# Altium PCB АСТА.758723.037_V1.PcbDoc
Units mm, origin at the board's own origin, x right, y up, seen from the top; angles counter-clockwise.
Board outline 70 x 50 mm, 2 copper layers (Top Layer, Bottom Layer), stack 1.47 mm thick; 54 components, 30 nets, 169 pads, 102 vias.
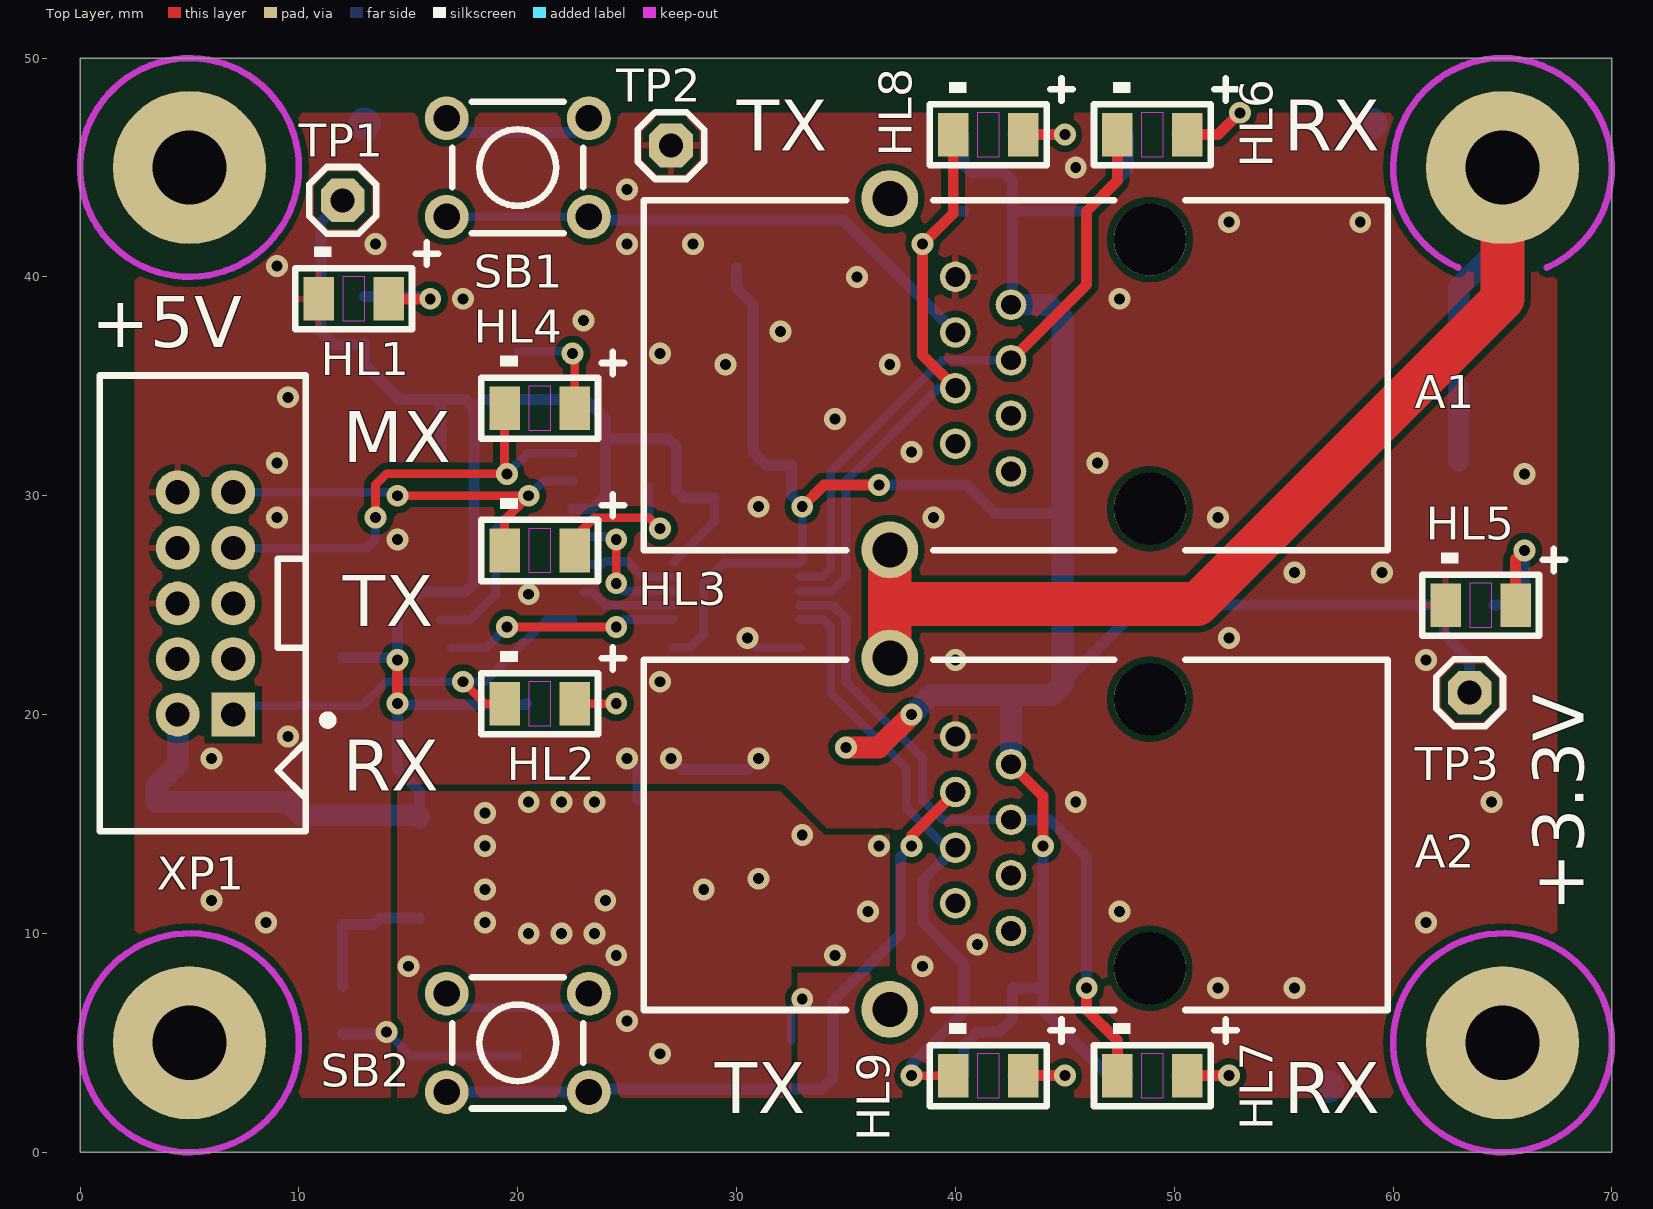
[diagram p0: Top Layer view]
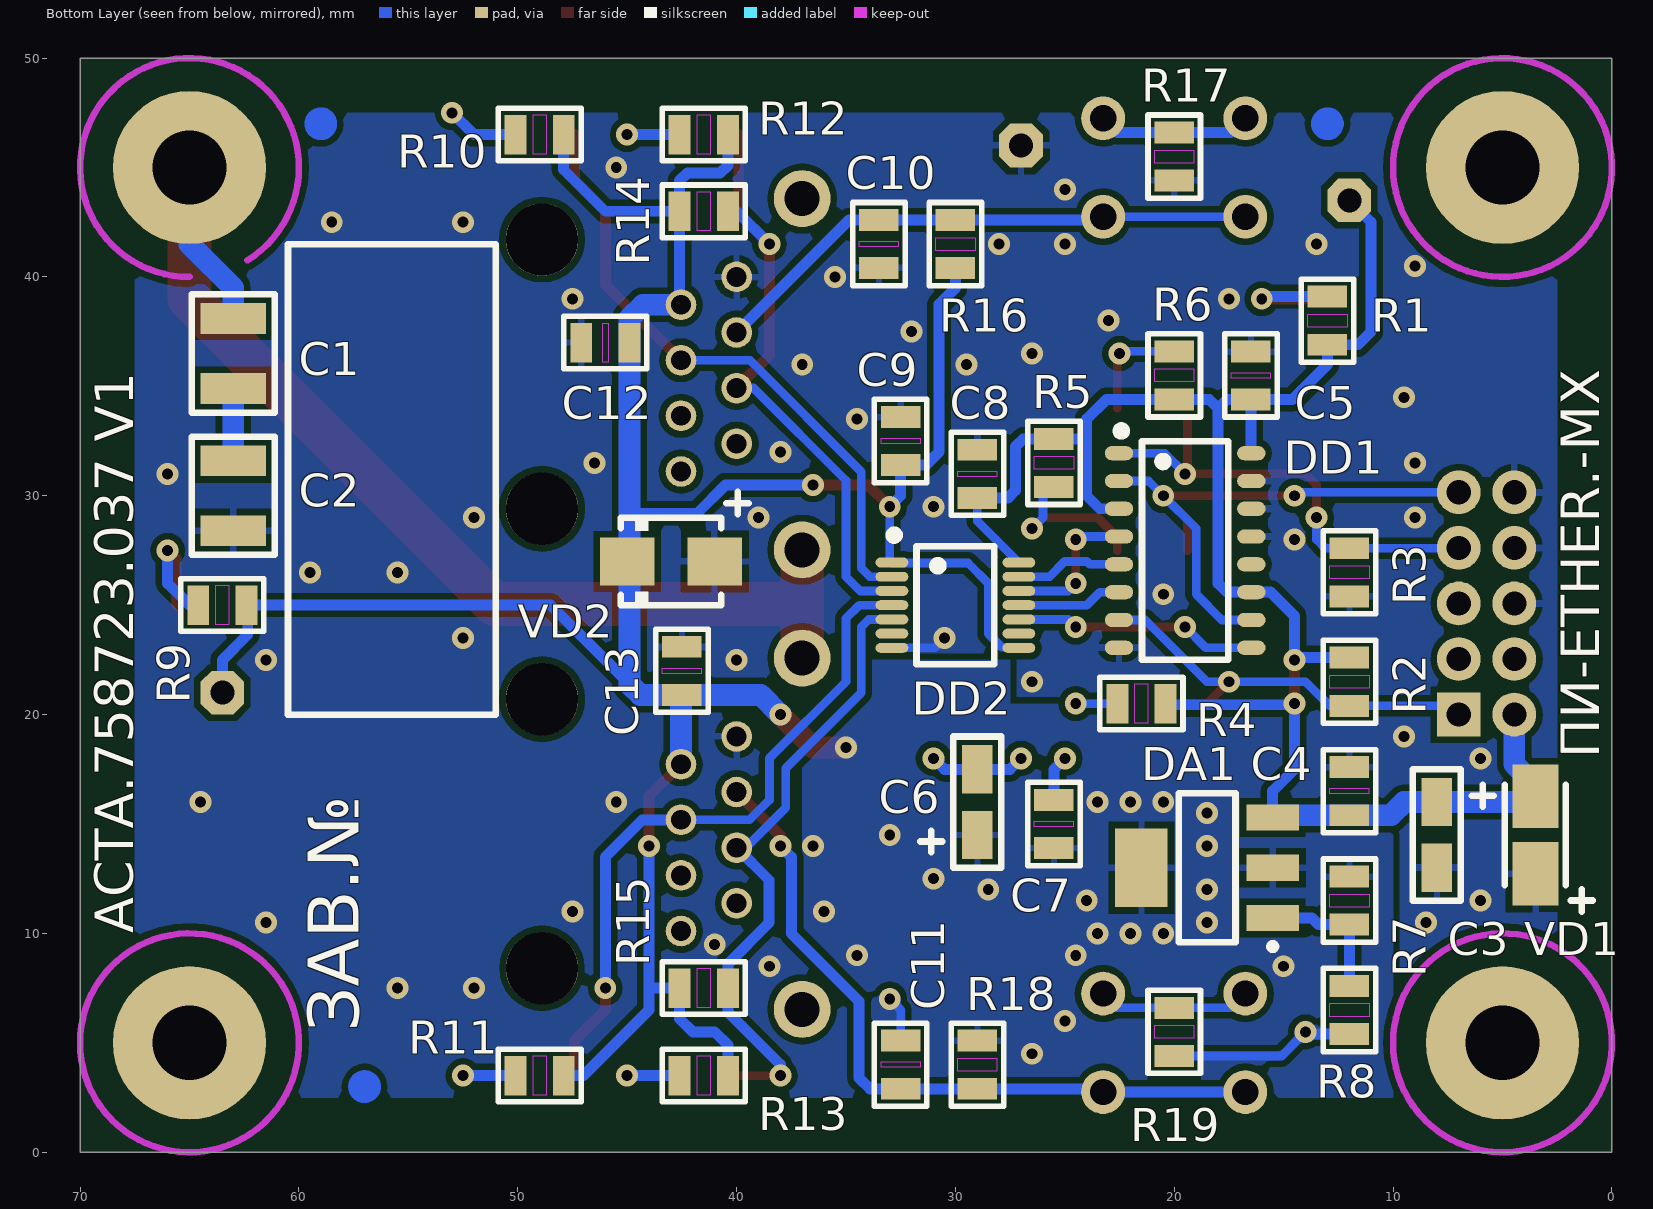
[diagram p1: Bottom Layer view, seen from below]
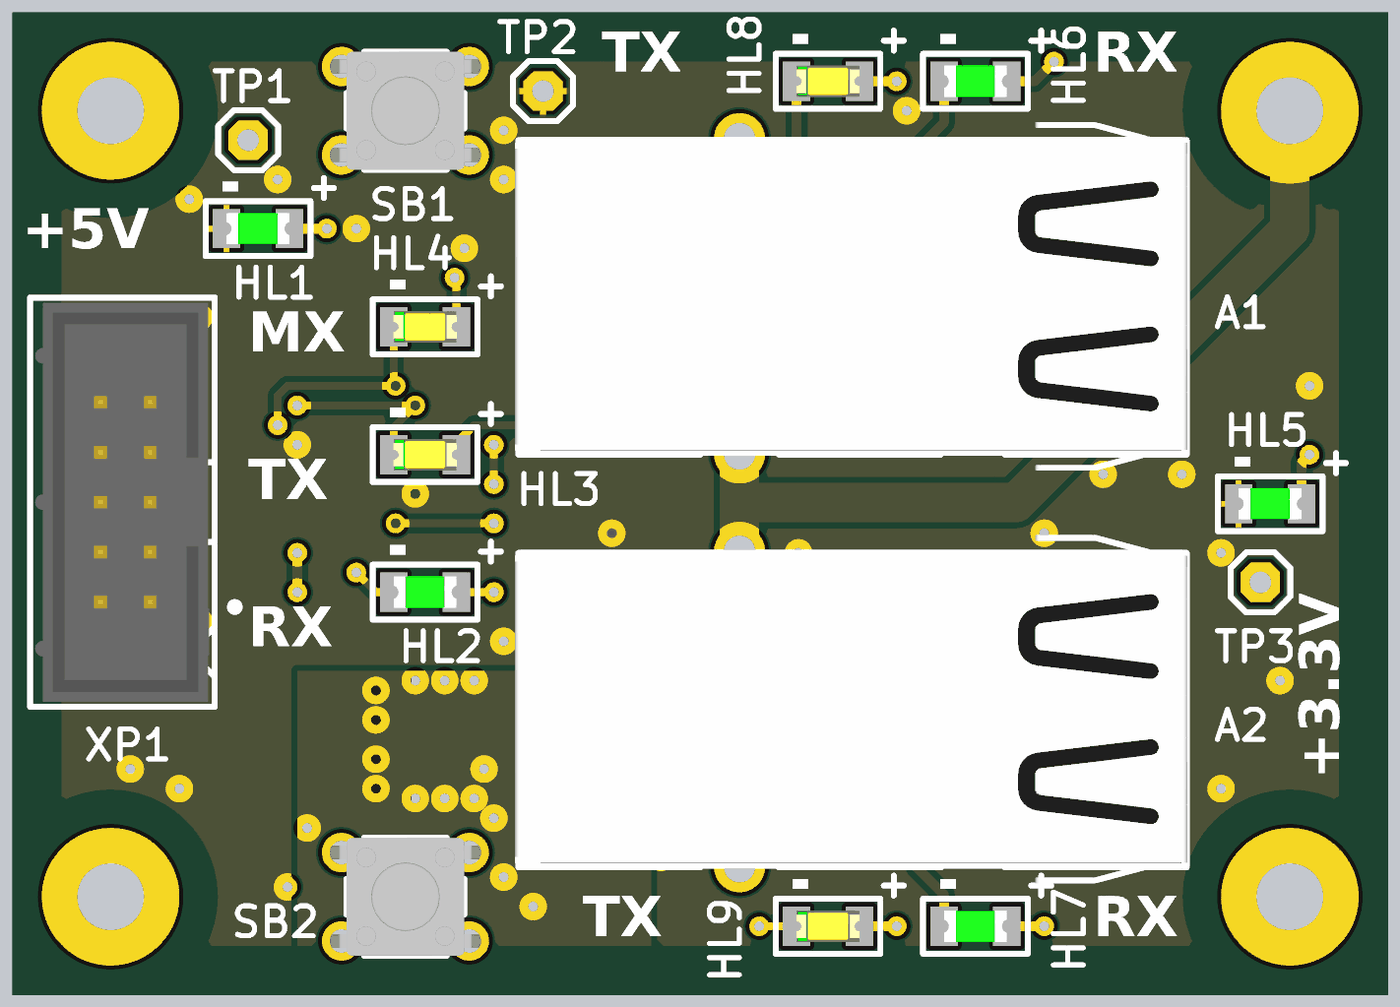
[diagram p2: 3D render of the assembled board from above, using the file's embedded part models]
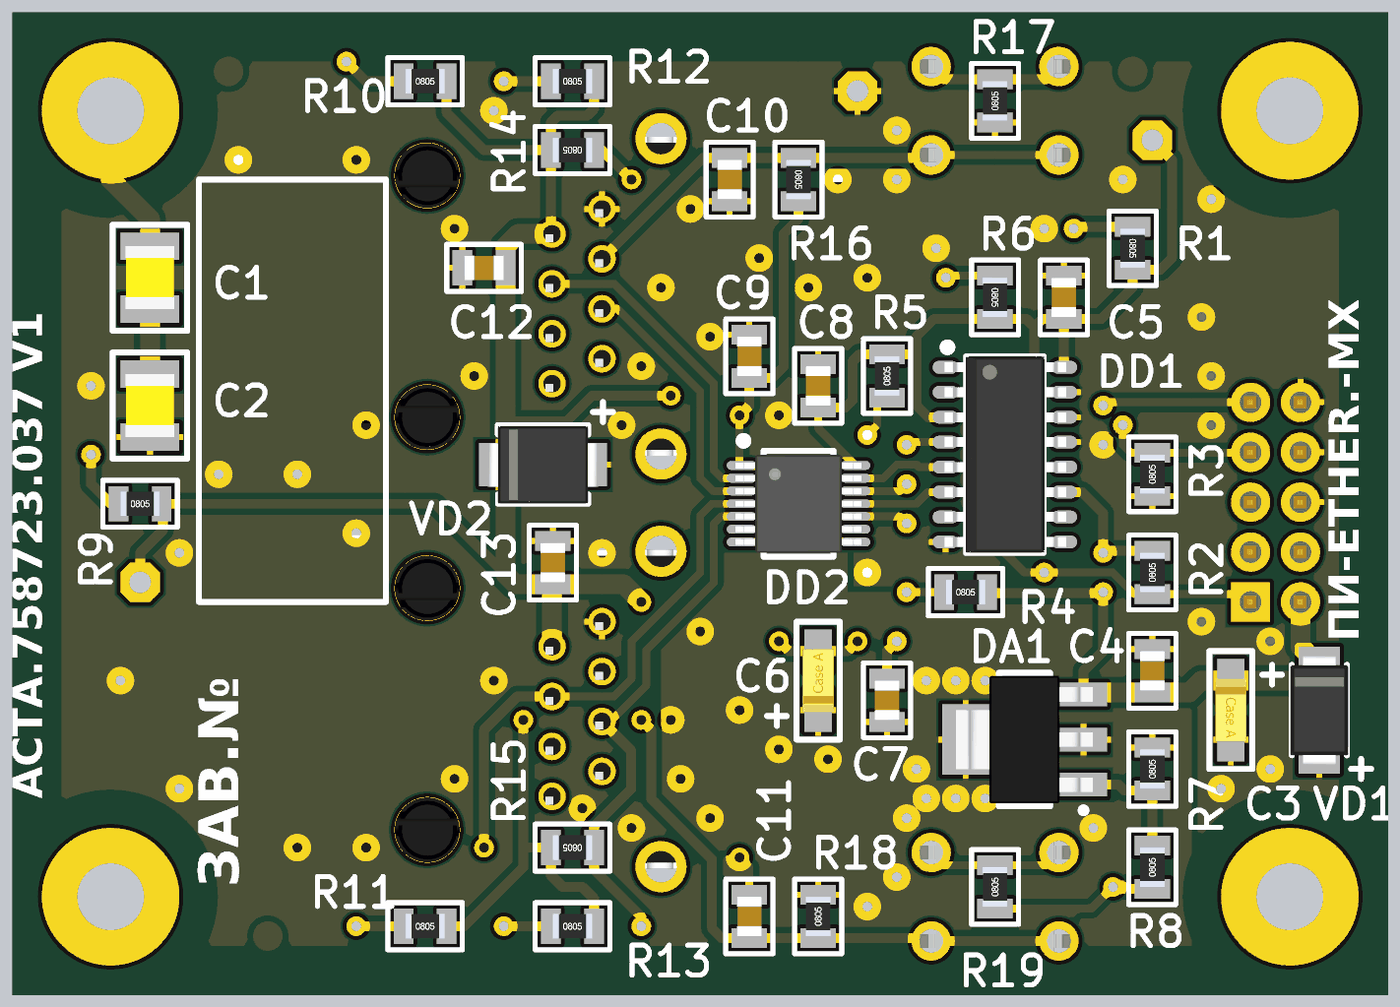
[diagram p3: 3D render of the assembled board from below, using the file's embedded part models]

## Layer stack, top to bottom
Top Solder: solder mask 0.015, Solder Resist, Dk 3.5
Top Layer: signal copper 0.035
Dielectric 1: dielectric 1.4, FR-4, Dk 4.8
Bottom Layer: signal copper 0.035
Bottom Solder: solder mask 0.015, Solder Resist, Dk 3.5

## Board outline
0,0 0,50 70,50 70,0

## Design rules (kind name [scope] priority, off if disabled: settings)
Clearance Clearance_GND-MCU [All vs InNamedPolygon('GND-MCU')] p1: gap=0.3 ignorepadtopadclearanceinfootprint=FALSE except(0: Arc-Hole Track-Hole SMDPad-Hole THPad-Hole Via-Hole Fill-Hole Poly-Hole Region-Hole Text-Hole; 0.2: Arc-Arc Arc-Track Arc-SMDPad Track-Track Track-SMDPad SMDPad-SMDPad SMDPad-Poly)
Clearance [All] p2: gap=0.3 ignorepadtopadclearanceinfootprint=FALSE except(0: Arc-Hole Track-Hole SMDPad-Hole THPad-Hole Via-Hole Fill-Hole Poly-Hole Region-Hole Text-Hole; 0.2: Arc-Arc Arc-Track Arc-SMDPad Track-Track Track-SMDPad SMDPad-SMDPad)
HoleSize [All] p1: absolutevalues=TRUE maxlimit=3.4 minlimit=0.5 maxpercent=80.000 minpercent=20.000
MinimumSolderMaskSliver [All] p1: minsoldermaskwidth=0.1
PolygonConnect PolygonConnect_via [isVia] p1: connectstyle=Direct reliefconductorwidth=0.254 reliefentries=4 polygonreliefangle="90 Angle" airgapwidth=0.254
PolygonConnect [All] p2: connectstyle=Relief reliefconductorwidth=0.3 reliefentries=4 polygonreliefangle="90 Angle" airgapwidth=0.3
RoutingVias [All] p1: holewidth=0.5 width=1 viastyle="Through Hole" minholewidth=0.5 minwidth=1 maxholewidth=0.6 maxwidth=1.2
SilkToSilkClearance [All] p1: silktosilkclearance=0
SilkToSolderMaskClearance [IsPad] p1: minsilkscreentomaskgap=0.1 clearancetoexposedcopper=TRUE
SolderMaskExpansion SolderMaskExpansion_via [isVia] p1: expansion=-0.2
SolderMaskExpansion [All] p2: expansion=0.2
Width [All] p1: maxlimit=2 minlimit=0.2 preferedwidth=0.3
26 further rules are at their usual default settings.

## Components (designator, comment, footprint, x,y, rotation, side; value= is the part's Value field where it differs from the comment)
A1 "XP1002000-05R" Lantronix_XPort 40,40 r180 top
A2 "XP1002000-05R" Lantronix_XPort 40,19 r180 top
C1 "CAP1210" CAP1210 63,36.5 r270 bottom value=220pF
C2 "CAP1210" CAP1210 63,30 r270 bottom value=220pF
C3 "CaseA_TantalumCap" CaseA_TantalumCap 8,14.5 r270 bottom value=22uF
C4 "CAP0805" CAP0805 12,16.5 r270 bottom value=1uF
C5 "CAP0805" CAP0805 16.5,35.5 r90 bottom value=0.1uF
C6 "CaseA_TantalumCap" CaseA_TantalumCap 29,16 r90 bottom value=22uF
C7 "CAP0805" CAP0805 25.5,15 r270 bottom value=1uF
C8 "CAP0805" CAP0805 29,31 r90 bottom value=0.1uF
C9 "CAP0805" CAP0805 32.5,32.5 r90 bottom value=0.1uF
C10 "CAP0805" CAP0805 33.5,41.5 r90 bottom value=0.1uF
C11 "CAP0805" CAP0805 32.5,4 r270 bottom value=0.1uF
C12 "CAP0805" CAP0805 46,37 r0 bottom value=0.1uF
C13 "CAP0805" CAP0805 42.5,22 r90 bottom value=0.1uF
DA1 "AMS1117" SOT-223 18.5,13 r0 bottom
DD1 "74HC257D" SOIC-16 19.5,27.5 r180 bottom
DD2 "TXS0104E" TSSOP-14 30,25 r180 bottom
HL1 "L-C150GCT" L-C150GCT 12.5,39 r0 top
HL2 "L-C150GCT" L-C150GCT 21,20.5 r0 top
HL3 "L-C150YCT" L-C150YCT 21,27.5 r0 top
HL4 "L-C150YCT" L-C150YCT 21,34 r0 top
HL5 "L-C150GCT" L-C150GCT 64,25 r0 top
HL6 "L-C150GCT" L-C150GCT 49,46.5 r0 top
HL7 "L-C150GCT" L-C150GCT 49,3.5 r0 top
HL8 "L-C150YCT" L-C150YCT 41.5,46.5 r0 top
HL9 "L-C150YCT" L-C150YCT 41.5,3.5 r0 top
R1 "RES0805" RES0805 13,38 r270 bottom value=3k
R2 "RES0805" RES0805 12,21.5 r90 bottom value=10k
R3 "RES0805" RES0805 12,26.5 r90 bottom value=10k
R4 "RES0805" RES0805 21.5,20.5 r180 bottom value=3k
R5 "RES0805" RES0805 25.5,31.5 r90 bottom value=3k
R6 "RES0805" RES0805 20,35.5 r270 bottom value=3k
R7 "RES0805" RES0805 12,11.5 r90 bottom value="220 Ohm"
R8 "RES0805" RES0805 12,6.5 r90 bottom value="360 Ohm"
R9 "RES0805" RES0805 63.5,25 r180 bottom value=1k
R10 "RES0805" RES0805 49,46.5 r180 bottom value=1k
R11 "RES0805" RES0805 49,3.5 r180 bottom value=1k
R12 "RES0805" RES0805 41.5,46.5 r180 bottom value=1k
R13 "RES0805" RES0805 41.5,3.5 r180 bottom value=1k
R14 "RES0805" RES0805 41.5,43 r0 bottom value=10k
R15 "RES0805" RES0805 41.5,7.5 r0 bottom value=10k
R16 "RES0805" RES0805 30,41.5 r270 bottom value=10k
R17 "RES0805" RES0805 20,45.5 r90 bottom value=1k
R18 "RES0805" RES0805 29,4 r90 bottom value=10k
R19 "RES0805" RES0805 20,5.5 r90 bottom value=1k
SB1 "Switronic 0643" "Switronic 0643" 20,45 r180 top
SB2 "Switronic 0643" "Switronic 0643" 20,5 r180 top
TP1 "TestPad" PAD-TH-OCT2x2-1.1 12,43.5 r0 top
TP2 "TestPad" PAD-TH-OCT2x2-1.1 27,46 r0 top
TP3 "TestPad" PAD-TH-OCT2x2-1.1 63.5,21 r0 top
VD1 "SMAJ5.0A" "SMA (DO-214AC)" 3.5,14.5 r270 bottom
VD2 "SMLVT3V3" "SMB (DO-214AA)" 43,27 r180 bottom
XP1 "IDC-10MS" IDC-10MS 7,20 r90 top

## Footprints (in the part's own frame and the unit in brackets; to place one, negate y for a bottom-side part, rotate by r counter-clockwise, add the part's x,y. Pads: shape width x height; smd on the part's side, far side on the other; paste and mask are expansions set on the pad)
CAP0805 [mm] "Chip Capacitor, 2-Leads, Body 2,00x1,25mm, IPC Low Density"
  rect 1x1.8 smd: 1(-1.1,0) 2(1.1,0)
  Top Layer keep-out region: -0.127,0.889 0.127,0.889 0.127,-0.889 -0.127,-0.889
  silkscreen extent -1.9,-1.2 1.9,1.2, body extent -1,-0.62 1,0.63, height 1
CAP1210 [mm]
  rect 1.4x3 smd: 1(-1.6,0) 2(1.6,0)
  silkscreen extent -2.7,-1.9 2.7,1.9, body extent -1.6,-1.25 1.6,1.25, height 2.5
CaseA_TantalumCap [mm]
  rect 2.2x1.4 smd: +(-1.5,0) -(1.5,0)
  silkscreen extent -3,-1.1 3,2.6, body extent -1.6,-0.8 1.6,0.8, height 1.6
IDC-10MS [mm] "Box Header Pitch 2.54mm"
  rect 2x2 hole 1.1: 1(0,0)
  round 2 hole 1.1: 2(0,2.54) 3(2.54,0) 4(2.54,2.54) 5(5.08,0) 6(5.08,2.54) 7(7.62,0) 8(7.62,2.54) 9(10.16,0) 10(10.16,2.54)
  silkscreen extent -5.33,-4.52 15.49,6.1, body extent -5.07,-3.01 15.23,5.84, height 9.33
L-C150GCT [mm] "3.2x1.6mm SMD LED Green"
  rect 1.4x2 smd: A(1.6,0) K(-1.6,0)
  Top Layer keep-out region: -0.5,-1 0.5,-1 0.5,1 -0.5,1
  silkscreen extent -2.67,-1.4 3.86,2.57, body extent -1.6,-0.8 1.6,0.8, height 1.1
L-C150YCT [mm] "3.2x1.6mm SMD LED Yellow"
  rect 1.4x2 smd: A(1.6,0) K(-1.6,0)
  Top Layer keep-out region: -0.5,-1 0.5,-1 0.5,1 -0.5,1
  silkscreen extent -2.67,-1.4 3.86,2.57, body extent -1.61,-0.8 1.61,0.8, height 1.1
Lantronix_XPort [mm] "XPort module"
  round 3.3 hole 3.3: 0(-8.89,10.595) 0(-8.89,-1.705)
  round 1.4 hole 0.9: 1(0,0) 2(-2.54,1.27) 3(0,2.54) 4(-2.54,3.81) 5(0,5.08) 6(-2.54,6.35) 7(0,7.62) 8(-2.54,8.89)
  round 2.6 hole 1.6: 9(3,12.47) 9(3,-3.58)
  silkscreen extent -19.75,-3.5 14.25,12.5, body extent -19.78,-4.42 14.42,13.32, height 14.76
PAD-TH-OCT2x2-1.1 [mm] "PAD TH 2x2mm Octogonal Hole 1.1mm"
  oct 2x2 hole 1.1: 1(0,0)
  silkscreen extent -1.52,-1.52 1.52,1.52
RES0805 [mm] "Chip Resistor, 2-Leads, Body 2,00x1,25mm, IPC Low Density"
  rect 1x1.8 smd: 1(-1.1,0) 2(1.1,0)
  Top Layer keep-out region: -0.3,0.9 0.3,0.9 0.3,-0.9 -0.3,-0.9
  silkscreen extent -1.9,-1.2 1.9,1.2, body extent -1,-0.62 1,0.63, height 0.47
"SMA (DO-214AC)" [mm] "Molded Diode, 2-Leads, Body 4,30x2,40mm, IPC Low Density"
  rect 2.9x2.1 smd: A(1.778,0) K(-1.778,0)
  silkscreen extent -2.3,-1.4 3.5,2.63, body extent -2.79,-1.47 2.81,1.48, height 2.9
"SMB (DO-214AA)" [mm] "Molded Diode, 2-Leads, Body 4,31x3,62mm, IPC Medium Density"
  rect 2.5x2.2 smd: A(2,0) K(-2,0)
  silkscreen extent -2.3,-2 3.56,3.17, body extent -2.8,-2 2.8,1.95, height 2.65
SOIC-16 [mm] "SOIC, 16-Leads, Body 9,90x3,90mm, Pitch 1,27mm, IPC Low Density"
  oval 1.3x0.65 smd: 1(-3.025,4.445) 2(-3.025,3.175) 3(-3.025,1.905) 4(-3.025,0.635) 5(-3.025,-0.635) 6(-3.025,-1.905) 7(-3.025,-3.175) 8(-3.025,-4.445) 9(3.025,-4.445) 10(3.025,-3.175) 11(3.025,-1.905) 12(3.025,-0.635) 13(3.025,0.635) 14(3.025,1.905) 15(3.025,3.175) 16(3.025,4.445)
  silkscreen extent -3.12,-5 1.97,5.66, body extent -3.08,-5 3.12,5, height 1.75
SOT-223 [mm] "SOT223, 4-Leads, Body 6,50x7,00mm (avg), Pitch 2,30mm, IPC Low Density"
  rect 2.4x1.2 smd: 1(-3,2.3) 2(-3,0) 3(-3,-2.3)
  rect 2.4x3.6 smd: 4(3,0)
  silkscreen extent -3.15,-3.4 1.3,3.75, body extent -3.48,-3.25 3.48,3.25, height 1.7
"Switronic 0643" [mm] "Tact button 6mm"
  round 2 hole 1.2: 1(-3.25,2.25) 1(3.25,2.25) 2(-3.25,-2.25) 2(3.25,-2.25)
  silkscreen extent -3,-3 3,3, body extent -3.88,-3 3.89,3, height 4.8
TSSOP-14 [mm]
  oval 1.5x0.45 smd: 1(-2.9,1.95) 2(-2.9,1.3) 3(-2.9,0.65) 4(-2.9,0) 5(-2.9,-0.65) 6(-2.9,-1.3) 7(-2.9,-1.95) 8(2.9,-1.95) 9(2.9,-1.3) 10(2.9,-0.65) 11(2.9,0) 12(2.9,0.65) 13(2.9,1.3) 14(2.9,1.95)
  silkscreen extent -3,-2.7 1.78,3.4, body extent -3.2,-2.5 3.2,2.5, height 1.1

## Part data
A1 A2: "Lantronix XPort Embedded Device Server"
C3 C6: Voltage=6.3V
DA1: "800mA Low Dropout Voltage Regulator"
DD1: "Quad 2-Input Multiplexer 3-State Non-Inverting Outputs"
DD2: "4-Bit Bidirectional Voltage-Level Translator for Open-Drain and Push-Pull  Applications"
HL1 HL2 HL5 HL6 HL7: "3.2x1.6mm SMD LED Green"
  HL1: Mark="\"+5V\""
  HL2 HL6 HL7: Mark="\"RX\""
  HL5: Mark="\"+3.3V\""
HL3 HL4 HL8 HL9: "3.2x1.6mm SMD LED Yellow"
  HL3 HL8 HL9: Mark="\"TX\""
  HL4: Mark="\"MX\""
SB1 SB2: "06 Series Tact Switches"
TP1 TP2 TP3: "TestPoint on PCB"
VD1: "5Vr 400W 43.5A UniDirectional TVS", Vbr=6.4V
VD2: "3.3Vr 600W 100A UniDirectional TVS", Vbr=4.1V
XP1: "Box Header Pitch 2.54mm", Circuit1=RXD, Circuit2=+5V, Circuit5=TXE, Circuit6=GND, Circuit7=MX, Circuit8=GND, Circuit9=TXD, Circuit10=GND, Label="\"Label\""

## Free pads (board coordinates)
  round 7 hole 3.4: 0(5,5) 0(5,45) 0(65,5) 0(65,45)

## Via types
v1: diameter 1, hole 0.5, Top Layer to Bottom Layer, 102 vias

## Nets (pads, with @x,y where several pads share a name; then routed paths per layer and width w, separated by ;. In a path a pad name is that pad's centre, name@x,y a point inside that pad or via, vN(x,y) a via of type N, cw(c..) or ccw(c..) an arc to the next point about the centre after c; other vN are vias at no path point)
+3.3V: A1.2 A2.2 C6.+ C7.2 C9.1 C12.1 C13.1 DA1.2 DA1.4 DD2.1 DD2.8 R7.2 R9.2 R10.2 R11.2 R12.2 R13.2 R14.2 R15.2 R16.2 R18.2 TP3.1 VD2.K | length 135.3
  Top Layer w0.5: v1(33,29.5) 34,30.5 v1(36.5,30.5) ; A2.2 44,16.27 v1(44,14)
  Top Layer w1: v1(35,18.5) 36.5,18.5 v1(38,20)
  Bottom Layer w0.4: DD2.8 27.125,23.075 27.884,23.075 28.5,23.691 28.5,26 29.425,26.925 32.875,26.925 DD2.1 33,27.05 v1(33,29.5)
  Bottom Layer w0.5: R16.2 30,39.5 30.75,38.75 30.75,32 31.35,31.4 C9.1 32.5,30 v1(33,29.5) ; v1(36.5,30.5) 40.5,30.5 41.8,29.2 44.9,29.2 ; R13.2 40.4,4.9 41,5.5 42,5.5 42.6,6.1 R15.2 44,7.5 ; R12.2 40.4,45.1 40.75,44.75 42.25,44.75 42.6,44.4 R14.2 ; A2.2@42.5,17.77 A2.2 ; A1.2 42.6,38.79 R14.2 ; v1(44,14) 44,7.5 ; 44.9,21.4 48.5,25 62.339,25 62.339,23.661 63.5,22.5 TP3.1 ; R11.2 47,3.5 44,6.5 44,7.5 ; R10.2 47.9,44.9 46,43 R14.2
  Bottom Layer w1: v1(38,20) 38.9,20.9 C13.1 ; A2.2 42.54,20.86 C13.1 ; A1.2 44.27,38.73 44.9,38.1 C12.1 44.9,29.2 44.9,21.4 44.4,20.9 C13.1
  other v1: 26.5,4.5 25,6 15,8.5 24.5,9 34.5,9 20.5,10 22,10 23.5,10 18.5,10.5 36,11 24,11.5 18.5,12 28.5,12 31,12.5 18.5,14 36.5,14 33,14.5 18.5,15.5 20.5,16 22,16 23.5,16
+5V: C3.+ C4.2 C5.1 C8.1 DA1.3 DD1.3 DD1.11 DD1.16 DD2.14 R1.2 R2.2 R4.2 R5.2 R6.2 TP1.1 VD1.K XP1.2 | length 87.7
  Top Layer w0.5: v1(14.5,20.5) v1(14.5,22.5)
  Bottom Layer w0.4: DD2.14 29,28.85 C8.1
  Bottom Layer w0.5: R2.2 14.4,22.6 v1(14.5,22.5) 14.5,24.5 15.595,25.595 DD1.11 17.595,25.595 18,26 18,34 ; TP1.1 11,42.5 11,37.5 11.6,36.9 R1.2 ; R1.2@13,37 R1.2 ; DA1.3 15.5,16.5 14.5,17.5 v1(14.5,20.5) 14.55,20.45 20.35,20.45 R4.2 ; DD1.16 16.5,31.97 C5.1 ; DD1.3 23.405,29.405 24,30 24,32.5 ; C8.1 27.6,29.9 27.25,30.25 27.25,32.25 26.9,32.6 24.1,32.6 24,32.5 ; R1.2 13,36 14.6,34.4 C5.1 ; C5.1 17.6,34.4 18,34 ; 18,34 18.4,34.4 R6.2 23.1,34.4 24,33.5 24,32.5
  Bottom Layer w1: XP1.2 4.46,17.738 3.5,16.778 3.5,16 C3.+ 9.5,16 10.1,15.4 C4.2 15.4,15.4 DA1.3
A1_RST: A1.3 C10.2 R16.1 SB1.1 | length 25.4
  Bottom Layer w0.4: SB1.1@16.75,42.75 23.25,42.75 SB1.1@23.4,42.6
  Bottom Layer w0.5: SB1.1@23.4,42.6 34.86,42.6 A1.3
A1_RX: A1.4 DD2.2 HL6.K | length 28.6
  Top Layer w0.5: A1.4 46,39.65 46,43 47.4,44.4 HL6.K
  Bottom Layer w0.4: DD2.2 33.9,26.3 34.3,26.7 34.3,31.1 39.39,36.19 A1.4
A1_TX: A1.5 DD2.3 HL8.K R14.1 | length 28.8
  Top Layer w0.5: HL8.K 39.9,42.9 v1(38.5,41.5) 38.5,36.42 A1.5
  Bottom Layer w0.4: DD2.3 34.35,25.65 35,26.3 35,30.7 39.22,34.92 A1.5
  Bottom Layer w0.5: v1(38.5,41.5) 40,43 R14.1
A2_RST: A2.3 C11.2 R18.1 SB2.1 | length 33.3
  Top Layer w0.5: v1(38,14) 38,14.46 A2.3
  Bottom Layer w0.4: SB2.1@23.25,2.75 SB2.1@23.4,2.9
  Bottom Layer w0.5: SB2.1@16.75,2.75 SB2.1@23.25,2.75 ; SB2.1@23.4,2.9 R18.1 C11.2 33.9,2.9 34.4,3.4 34.4,6.9 37.5,10 37.5,13.5 v1(38,14)
A2_RX: A2.4 DD2.4 HL7.K | length 31.3
  Top Layer w0.5: v1(46,7.5) 46,6.5 47.4,5.1 HL7.K
  Bottom Layer w0.4: DD2.4 34.4,25 35,24.4 35,21.5 38.5,18 38.5,16.1 39.41,15.19 A2.4
  Bottom Layer w0.5: A2.4 44.31,15.19 46,13.5 v1(46,7.5)
A2_TX: A2.5 DD2.5 HL9.K R15.1 | length 28.9
  Top Layer w0.4: v1(38,3.5) HL9.K
  Bottom Layer w0.4: DD2.5 33.95,24.35 34.3,24 34.3,21 37.75,17.55 37.75,15.75 39.58,13.92 A2.5
  Bottom Layer w0.5: v1(38,3.5) 38,4 40.4,6.4 R15.1 40.4,8.6 38.51,10.49 38.51,12.43 A2.5
GND: A1.1 A2.1 C2.2 C3.- C4.1 C5.2 C6.- C7.1 C8.2 C9.2 C10.1 C11.1 C12.2 C13.2 DD1.8 DD1.13 DD1.14 DD1.15 DD2.7 HL1.K HL5.K R3.1 R8.1 R17.1 R19.1 TP2.1 VD1.A VD2.A XP1.6 XP1.8 XP1.10 | length 19.9
  Bottom Layer w0.4: v1(14,5.5) 15.1,4.4 R19.1 ; v1(30.5,23.5) 30.95,23.05 DD2.7 ; C11.1 32.5,6.5 v1(33,7)
  Bottom Layer w0.5: R8.1 13.9,5.4 v1@14.15,5.65 ; v1(25,18) 25.5,17.5 C7.1 ; v1(27,18) 27.5,17.5 C6.- 30.5,17.5 v1(31,18)
  other v1: 52,7.5 55.5,7.5 38.5,8.5 41,9.5 8.5,10.5 61.5,10.5 47.5,11 6,11.5 45.5,16 64.5,16 6,18 9.5,19 26.5,21.5 40,22.5 61.5,22.5 52.5,23.5 20.5,25.5 55.5,26.5 59.5,26.5 14.5,28 9,29 39,29 52,29 31,29.5 66,31 9,31.5 46.5,31.5 38,32 34.5,33.5 9.5,34.5 29.5,36 37,36 26.5,36.5 32,37.5 23,38 17.5,39 47.5,39 35.5,40 9,40.5 13.5,41.5 25,41.5 28,41.5 52.5,42.5 58.5,42.5 25,44 45.5,45
M1_RX: DD1.5 DD2.13 | length 4.9
  Bottom Layer w0.4: DD1.5 23.865,26.865 24,27 25,27 25.7,26.3 DD2.13
M1_TX: DD1.4 DD2.12 | length 6.8
  Top Layer w0.4: v1(24.5,26) v1(24.5,28)
  Bottom Layer w0.4: DD1.4 24.365,28.135 v1(24.5,28) ; v1(24.5,26) 24.85,25.65 DD2.12
M2_RX: DD1.6 DD2.11 | length 4.3
  Bottom Layer w0.4: DD1.6@23.025,25.595 23.405,25.595 24,25 DD2.11
M2_TX: DD1.9 DD2.10 | length 10.7
  Top Layer w0.4: v1(19.5,24) v1(24.5,24)
  Bottom Layer w0.4: DD1.9@16.975,23.055 18.555,23.055 v1(19.5,24) ; v1(24.5,24) 24.85,24.35 DD2.10
MX: DD1.1 HL4.K R3.2 XP1.7 | length 21.3
  Top Layer w0.4: v1(13.5,29) 13.5,30.5 14,31 v1(19.5,31) 19.5,31.2 19.4,31.3 HL4.K@19.4,33.5
  Bottom Layer w0.4: XP1.7 7.02,27.6 R3.2 13.1,27.6 13.5,28 v1(13.5,29) ; v1(19.5,31) 20.445,31.945 DD1.1
NetC1_2: C1.2 C2.1 | length 3.3
  Bottom Layer w1: C2.1 C1.2
NetDA1_1: DA1.1 R7.1 R8.2 | length 6.4
  Bottom Layer w0.5: R8.2 R7.1 13.4,10.4 13.7,10.7 DA1.1
NetHL1_A: HL1.A R1.1 | length 4.9
  Top Layer w0.5: HL1.A v1(16,39)
  Bottom Layer w0.5: R1.1 15.9,39.1 v1(16,39)
NetHL2_A: HL2.A R4.1 | length 3.8
  Top Layer w0.4: HL2.A v1(24.5,20.5)
  Bottom Layer w0.4: R4.1 v1(24.5,20.5)
NetHL3_A: HL3.A R5.1 | length 7.2
  Top Layer w0.4: HL3.A 22.6,28.1 23.5,29 26,29 v1(26.5,28.5)
  Bottom Layer w0.4: R5.1@26,30.4 26,29 v1(26.5,28.5)
NetHL4_A: HL4.A R6.1 | length 5.1
  Top Layer w0.4: v1(22.5,36.5) 22.6,36.4 HL4.A
  Bottom Layer w0.4: R6.1 22.4,36.6 v1(22.5,36.5)
NetHL5_A: HL5.A R9.1 | length 6
  Top Layer w0.5: HL5.A 65.6,27.1 v1(66,27.5)
  Bottom Layer w0.5: R9.1 65,25 66,26 v1(66,27.5)
NetHL6_A: HL6.A R10.1 | length 6.1
  Top Layer w0.5: HL6.A 52,46.5 v1(53,47.5)
  Bottom Layer w0.5: R10.1 52,46.5 v1(53,47.5)
NetHL7_A: HL7.A R11.1 | length 4.3
  Top Layer w0.5: HL7.A v1(52.5,3.5)
  Bottom Layer w0.5: R11.1 v1(52.5,3.5)
NetHL8_A: HL8.A R12.1 | length 4.3
  Top Layer w0.5: HL8.A v1(45,46.5)
  Bottom Layer w0.5: R12.1 v1(45,46.5)
NetHL9_A: HL9.A R13.1 | length 4.3
  Top Layer w0.5: HL9.A v1(45,3.5)
  Bottom Layer w0.5: R13.1 v1(45,3.5)
NetR17_2: R17.2 SB1.2 | length 7
  Bottom Layer w0.5: SB1.2@16.75,47.25 17.4,46.6 R17.2 22.6,46.6 SB1.2@23.25,47.25
NetR19_2: R19.2 SB2.2 | length 7
  Bottom Layer w0.4: SB2.2@16.75,7.25 17.4,6.6 R19.2 22.6,6.6 SB2.2@23.25,7.25
PE: A1.9 A2.9 C1.1 pad.0@65,45 | length 52.5
  Top Layer w2: A2.9@37,22.58 37,25.055 ; A1.9@37,27.53 37,25.055 ; pad.0@65,45 65,39 51.055,25.055 37,25.055
  Bottom Layer w1: C1.1 63,39.5 65,41.5 pad.0@65,45
RX: DD1.7 HL2.K R2.1 XP1.1 | length 19.6
  Top Layer w0.4: v1(17.5,21.5) 18.5,20.5 HL2.K
  Bottom Layer w0.4: XP1.1 7.4,20.4 R2.1 12.9,20.4 14,21.5 v1(17.5,21.5) 18.5,21.5 21.325,24.325 DD1.7
TX: DD1.2 DD1.10 HL3.K XP1.9 | length 27
  Top Layer w0.4: v1(14.5,30) v1(20.5,30) 19.4,28.9 HL3.K
  Bottom Layer w0.4: XP1.9 14.34,30.16 v1(14.5,30) ; DD1.10 17.825,24.325 19,25.5 19,28.5 v1(20.5,30) 21.175,30.675 DD1.2
pads on no net: A1.0 A1.6 A1.7 A1.8 A2.0 A2.6 A2.7 A2.8 DD1.12 DD2.6 DD2.9 XP1.3 XP1.4 XP1.5
copper on no net: | length 7.1
  Bottom Layer w0.75: 13.375,47 ccw(c13,47) 13.375,47 ; 57.375,3 ccw(c57,3) 57.375,3 ; 59.375,47 ccw(c59,47) 59.375,47

## Polygon pours and split planes (outlines as drawn)
+3.3V on Bottom Layer "+3.3V_L02_P002" (solid, remove dead copper, pour order 2): 10,2.5 10,20.5 27.5,20.5 27.5,22.5 37,22.5 37,2.5
GND on Bottom Layer "GND_L02_P008" (solid, remove dead copper, pour order 8): 2.5,2.5 2.5,47.5 67.5,47.5 67.5,2.5
+3.3V on Top Layer "+3.3V_L01_P004" (solid, remove dead copper, pour order 4): 14.5,16.5 32,16.5 34,14.5 37,14.5 37,8.5 32.5,8.5 32.5,2.5 14.5,2.5
GND on Top Layer "GND_L01_P006" (solid, remove dead copper, pour order 6): 2.5,2.5 2.5,47.5 67.5,47.5 67.5,2.5

## Keep-outs
Top Layer:
  circle w0.3: c5,5 r5
  circle w0.3: c5,45 r5
  circle w0.3: c65,5 r5
  lines w0.3: 62.969,40.431 cw(c65,45) 67.031,40.431
Bottom Layer:
  circle w0.3: c5,5 r5
  circle w0.3: c5,45 r5
  circle w0.3: c65,5 r5
  lines w0.3: 62.35,40.76 cw(c65,45) 65,40

## Silkscreen, mask and mechanical layers (free items; w line width, h text height)
Top Overlay:
  text "TX" at 30,45 h4
  text "RX" at 55,45 h4
  text "+5V" at 0.5,36 h4
  text "MX" at 12,30.75 h4
  text "ТX" at 12,23.25 h4
  text "RX" at 12,15.75 h4
  text "+3.3V" at 69.5,11 h4 r90
  text "TX" at 29,1 h4
  text "RX" at 55,1 h4
Bottom Overlay:
  lines w0.3: 51,20 60.5,20 60.5,41.5 51,41.5 51,20
  text "ПИ-ETHER.-MX" at 0,18 h3 r270
  text "АСТА.758723.037 V1" at 67,10 h3 r270
  text "ЗАВ.№" at 56.5,5.5 h4 r270
Mechanical 13:
  circle w0.1: c5,45 r1.7
  circle w0.1: c5,5 r1.7
  circle w0.1: c65,45 r1.7
  circle w0.1: c65,5 r1.7
  lines w0.1: 2.5,5 7.5,5 ; 2.5,45 7.5,45 ; 5,2.5 5,7.5 ; 5,42.5 5,47.5 ; 62.5,5 67.5,5 ; 62.5,45 67.5,45 ; 65,2.5 65,7.5 ; 65,42.5 65,47.5 ; 0,0 70,0 70,50 0,50 0,0
Mechanical 14:
  circle w0.1: c5,45 r1.7
  circle w0.1: c5,5 r1.7
  circle w0.1: c65,45 r1.7
  circle w0.1: c65,5 r1.7
  lines w0.1: 2.5,5 7.5,5 ; 2.5,45 7.5,45 ; 5,2.5 5,7.5 ; 5,42.5 5,47.5 ; 62.5,5 67.5,5 ; 62.5,45 67.5,45 ; 65,2.5 65,7.5 ; 65,42.5 65,47.5 ; 0,0 70,0 70,50 0,50 0,0